# EAGLE board mcuboard (EAGLE 7.1.0)
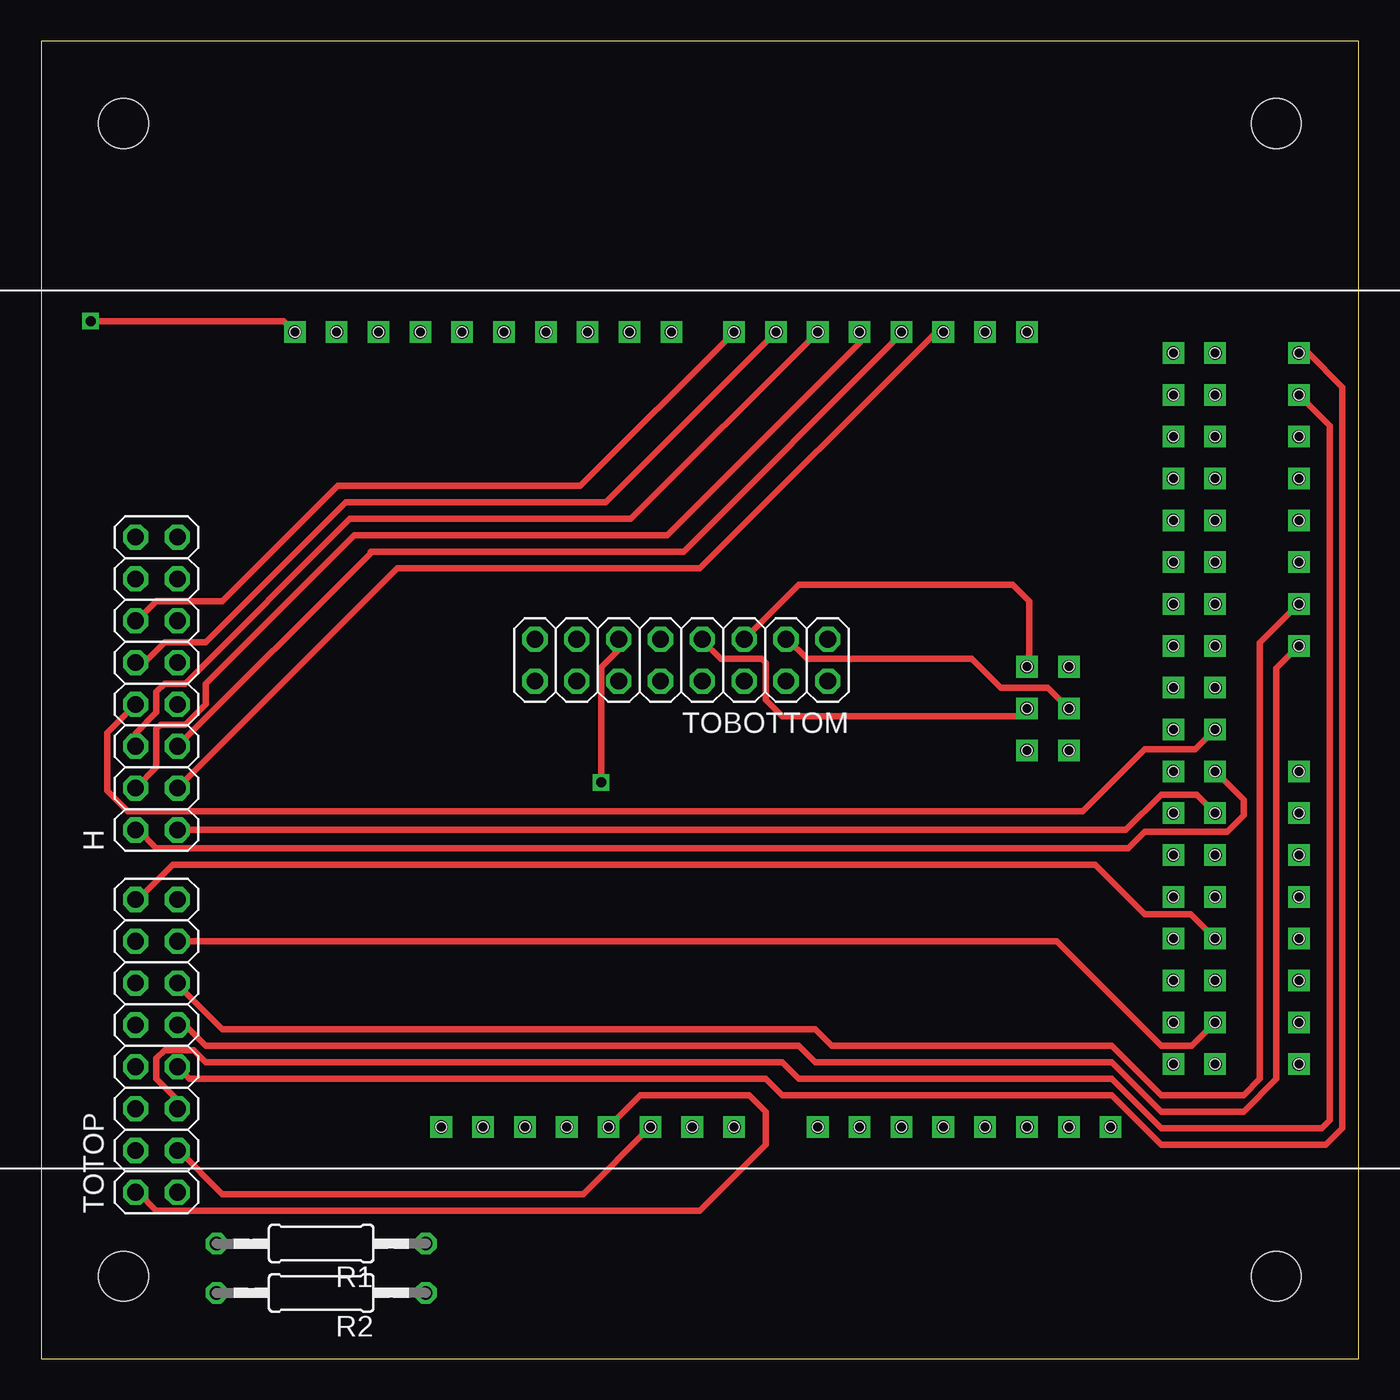
[diagram p0: board, top side]
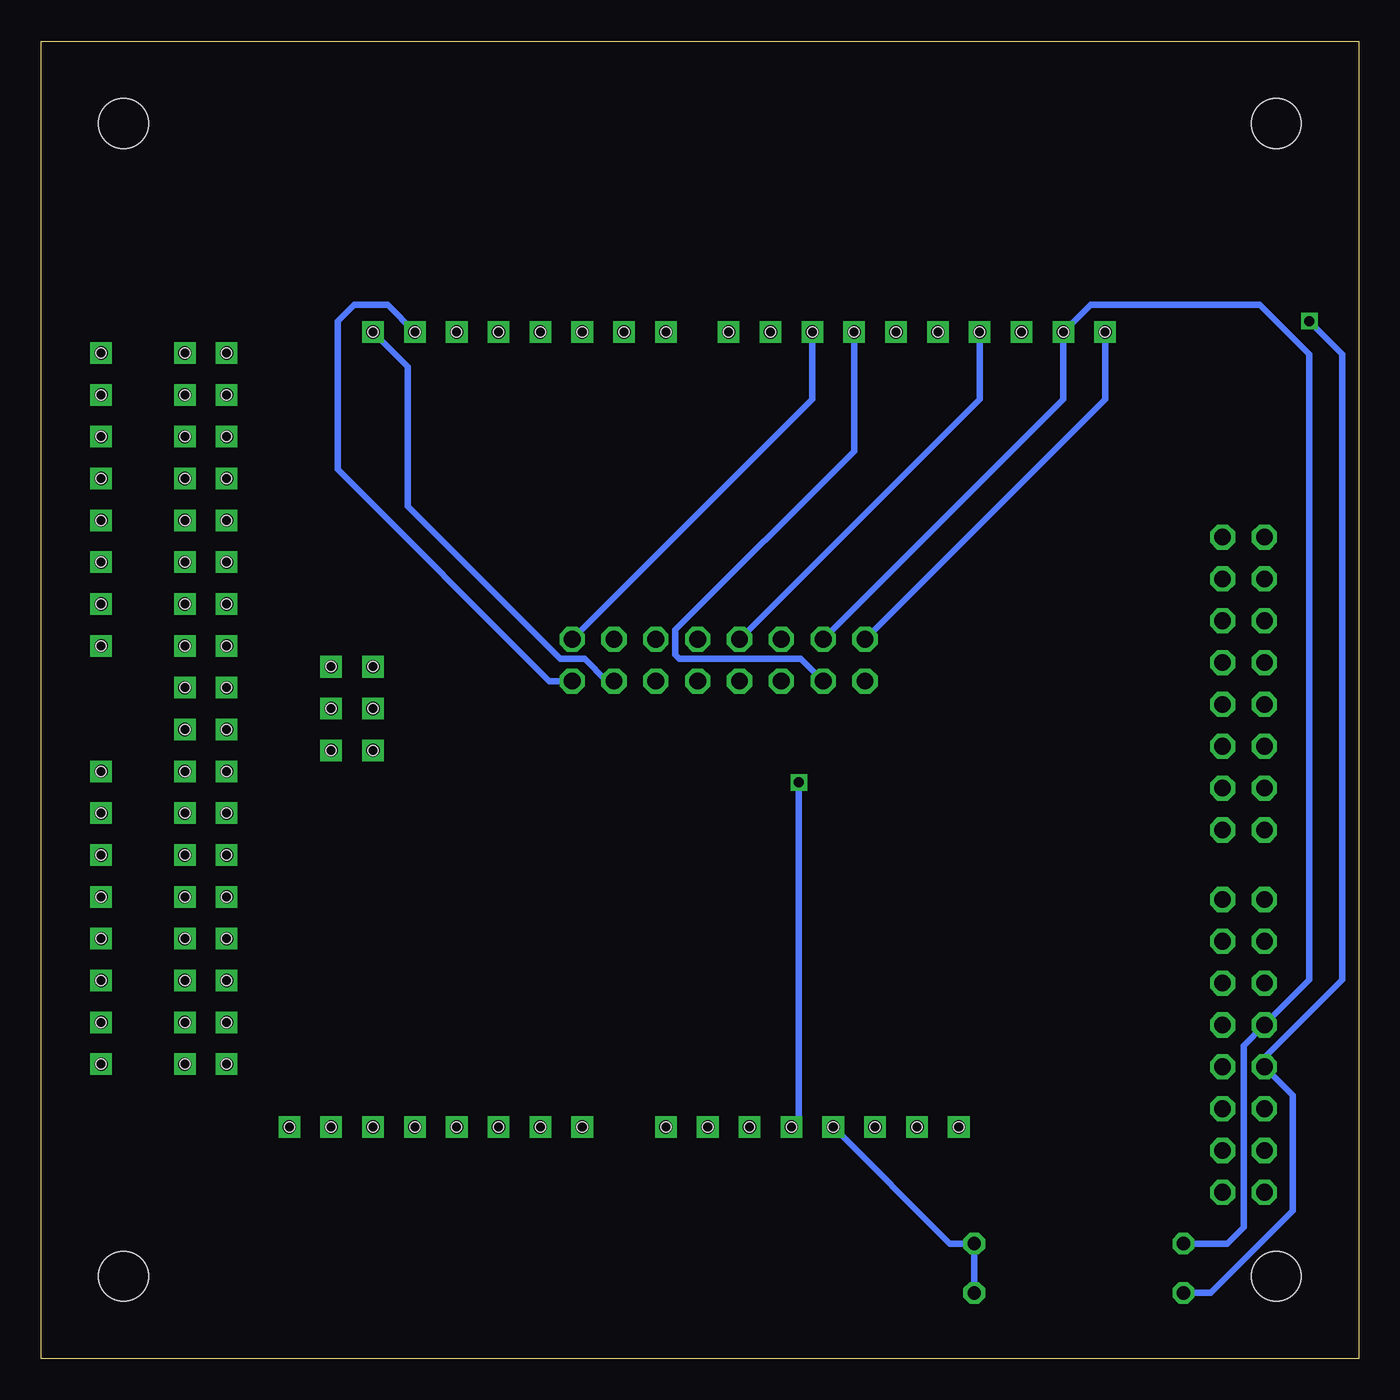
[diagram p1: board, bottom side, seen from below]

Size 80 x 80 mm. Coordinates in mm from the lower left corner, seen from the top.
Outline: 0,0 80,0 80,80 0,80 0,0
Copper layers (1*16): Top 0.035mm / dielectric 1.5mm / Bottom 0.035mm
Design rules "default": minimum track width 10mil, minimum drill 24mil, track to track 8mil, track to pad 8mil, pad to pad 8mil, via to via 8mil, smd to smd 8mil, copper to edge 40mil, drill to drill 8mil, minimum pad ring 10mil, minimum via ring 8mil, stop-mask expansion 4mil, vias tented up to drill 0mil, thermal gap 10mil
Holes 3 mm at 5,75 75,75 75,5 5,5

## Footprints (pad centres in the part's own frame; a part is rotated, then mirrored left to right if it is on the bottom)
2X08 = drill 1.016 octagon: 1 -8.89,-1.27; 2 -8.89,1.27; 3 -6.35,-1.27; 4 -6.35,1.27; 5 -3.81,-1.27; 6 -3.81,1.27; 7 -1.27,-1.27; 8 -1.27,1.27; 9 1.27,-1.27; 10 1.27,1.27; 11 3.81,-1.27; 12 3.81,1.27; 13 6.35,-1.27; 14 6.35,1.27; 15 8.89,-1.27; 16 8.89,1.27
0207/12 = drill 0.813 octagon: 1 -6.35,0; 2 6.35,0
IDUINO_PAC = drill 0.8 square: 2 12.7,6.35; 3 10.16,6.35; 3.3V -10.16,-41.91; 4 7.62,6.35; 5 5.08,6.35; 5V -7.62,-41.91; 5V_D 26.67,5.08; 5V_E 29.21,5.08; 5V_S 20.32,-13.97; 6 2.54,6.35; 7 0,6.35; 8 -3.81,6.35; 9 -6.35,6.35; 10 -8.89,6.35; 11 -11.43,6.35; 12 -13.97,6.35; 13 -16.51,6.35; 22 26.67,2.54; 23 29.21,2.54; 24 26.67,0; 25 29.21,0; 26 26.67,-2.54; 27 29.21,-2.54; 28 26.67,-5.08; 29 29.21,-5.08; 30 26.67,-7.62; 31 29.21,-7.62; 32 26.67,-10.16; 33 29.21,-10.16; 34 26.67,-12.7; 35 29.21,-12.7; 36 26.67,-15.24; 37 29.21,-15.24; 38 26.67,-17.78; 39 29.21,-17.78; 40 26.67,-20.32; 41 29.21,-20.32; 42 26.67,-22.86; 43 29.21,-22.86; 44 26.67,-25.4; 45 29.21,-25.4; 46 26.67,-27.94; 47 29.21,-27.94; 48 26.67,-30.48; 49 29.21,-30.48; 50 26.67,-33.02; 51 29.21,-33.02; 52 26.67,-35.56; 53 29.21,-35.56; A0 5.08,-41.91; A1 7.62,-41.91; A2 10.16,-41.91; A3 12.7,-41.91; A4 15.24,-41.91; A5 17.78,-41.91; A6 20.32,-41.91; A7 22.86,-41.91; A8 34.29,-38.1; A9 34.29,-35.56; A10 34.29,-33.02; A11 34.29,-30.48; AREF -21.59,6.35; CANRX 34.29,-22.86; CANTX 34.29,-20.32; DAC0 34.29,-27.94; DAC1 34.29,-25.4; GND_A1 -5.08,-41.91; GND_A2 -2.54,-41.91; GND_D 26.67,-38.1; GND_E 29.21,-38.1; GND_H -19.05,6.35; GND_S 20.32,-19.05; IOREF -15.24,-41.91; MASTER-RESET 17.78,-19.05; MISO 17.78,-13.97; MOSI 20.32,-16.51; NONE_A -17.78,-41.91; RESET -12.7,-41.91; RX0 17.78,6.35; RX1 34.29,-7.62; RX2 34.29,-2.54; RX3 34.29,2.54; SCL 34.29,-12.7; SCL1 -26.67,6.35; SDA 34.29,-10.16; SDA1 -24.13,6.35; SPCK 17.78,-16.51; TX0 15.24,6.35; TX1 34.29,-5.08; TX2 34.29,0; TX3 34.29,5.08; VIN 0,-41.91 | hole 0.6: 2.54,6.35; 5.08,6.35; 7.62,6.35; 10.16,6.35; 12.7,6.35; 26.67,5.08; 26.67,2.54; 26.67,0; 26.67,-2.54; 26.67,-5.08; 26.67,-7.62; 26.67,-10.16; 26.67,-12.7; 26.67,-15.24; 26.67,-17.78; 26.67,-20.32; 26.67,-22.86; 26.67,-25.4; 26.67,-27.94; 26.67,-30.48; 26.67,-33.02; 26.67,-35.56; 26.67,-38.1; 29.21,5.08; 29.21,2.54; 29.21,0; 29.21,-2.54; 29.21,-5.08; 29.21,-7.62; 29.21,-10.16; 29.21,-12.7; 29.21,-15.24; 29.21,-17.78; 29.21,-20.32; 29.21,-22.86; 29.21,-25.4; 29.21,-27.94; 29.21,-30.48; 29.21,-33.02; 29.21,-35.56; 29.21,-38.1; 34.29,5.08; 34.29,2.54; 34.29,0; 34.29,-2.54; 34.29,-5.08; 34.29,-7.62; 34.29,-10.16; 34.29,-12.7; 34.29,-38.1; 34.29,-35.56; 34.29,-33.02; 34.29,-30.48; 34.29,-27.94; 34.29,-25.4; 34.29,-22.86; 34.29,-20.32; 22.86,-41.91; 20.32,-41.91; 17.78,-41.91; 15.24,-41.91; 12.7,-41.91; 10.16,-41.91; 7.62,-41.91; 5.08,-41.91; 0,-41.91; -2.54,-41.91; -5.08,-41.91; -7.62,-41.91; -10.16,-41.91; -12.7,-41.91; -15.24,-41.91; -17.78,-41.91; 17.78,6.35; 15.24,6.35; 0,6.35; -3.81,6.35; -6.35,6.35; -8.89,6.35; -11.43,6.35; -13.97,6.35; -16.51,6.35; -19.05,6.35; -21.59,6.35; -24.13,6.35; -26.67,6.35; 20.32,-19.05; 20.32,-16.51; 20.32,-13.97; 17.78,-13.97; 17.78,-16.51; 17.78,-19.05

## Placement (x,y rotation side)
H  [2X08]  7,41 90 top
R1  [0207/12]  17,7 180 top
R2  [0207/12]  17,4 180 top
TOBOTTOM  [2X08]  38.87,42.42 180 top
TOTOP  [2X08]  7,19 90 top
U$1  IDUINO1  [IDUINO_PAC]  42.07,55.99 0 top

## Library data of the parts
H TOBOTTOM TOTOP = pinhead
R1 R2 = resistor; SPICEPREFIX: R
U$1 = iduino

## Nets
N$1: TOBOTTOM.7 U$1.SPCK
N$2: TOBOTTOM.3 U$1.MOSI
N$3: TOBOTTOM.5 U$1.MISO
N$4: TOBOTTOM.9 U$1.GND_H
N$5: TOBOTTOM.11 TOTOP.2 U$1.5V
N$6: R1.2 TOBOTTOM.13 TOTOP.10 U$1.SDA1
N$7: R2.2 TOBOTTOM.15 TOTOP.8 U$1.SCL1
N$8: TOBOTTOM.2 U$1.TX0
N$9: TOTOP.3 U$1.GND_A1
N$10: TOBOTTOM.4 U$1.RX0
N$11: TOBOTTOM.14 U$1.11
N$12: TOBOTTOM.1 U$1.10
N$13: TOTOP.5 U$1.RX3
N$14: TOTOP.7 U$1.TX3
N$15: TOTOP.9 U$1.SCL
N$16: TOTOP.11 U$1.SDA
N$17: R1.1 R2.1 U$1.3.3V
N$18: TOTOP.13 U$1.53
N$19: TOTOP.15
N$20: TOTOP.16 U$1.49
N$21: TOTOP.14
N$22: TOTOP.12
N$23: H.1 U$1.43
N$24: H.8 U$1.39
N$25: H.3 U$1.2
N$26: H.5 U$1.3
N$27: H.4 U$1.4
N$29: H.2 U$1.41
N$30: H.10 U$1.6
N$31: H.12 U$1.7
N$33: H.6 U$1.5

## Tracks (layer width: path | path; a pad name or v marks a point on that pad's centre or on a via)
N$1
  Top 0.406: TOBOTTOM.7 40.14,43.61 41.25,42.5 43.75,42.5 44,42.25 44,40 45,39 59.37,39 U$1.SPCK
N$2
  Top 0.406: TOBOTTOM.3 45.31,43.69 46.5,42.5 56.5,42.5 58.25,40.75 61.12,40.75 U$1.MOSI
N$3
  Top 0.406: TOBOTTOM.5 46,47 59,47 60,46 60,42.17 U$1.MISO
N$4
  Bottom 0.406: U$1.GND_H 23.02,58.27 TOBOTTOM.9
N$5  (via drill 0.6)
  Top 0.406: TOTOP.2 5.89,10.11 7,9 40,9 44,13 44,15 43,16 36.37,16 U$1.5V | TOBOTTOM.11 35.06,43.06 34,42 v34,35
  Bottom 0.406: v34,35 34,14.53 U$1.5V
N$6
  Bottom 0.406: TOBOTTOM.13 17.94,58.27 U$1.SDA1 16.28,64 6,64 3,61 3,23 TOTOP.10 7,19 7,8 8,7 R1.2
N$7  (via drill 0.6)
  Top 0.406: v3,63 14.74,63 U$1.SCL1
  Bottom 0.406: U$1.SCL1 15.4,58.27 TOBOTTOM.15 | R2.2 9,4 4,9 4,16 TOTOP.8 5.73,18.27 1,23 1,61 v3,63
N$8
  Bottom 0.406: TOBOTTOM.2 49.15,41.15 62,54 62,63 61,64 58.97,64 U$1.TX0
N$9
  Top 0.406: TOTOP.3 8.35,12.65 11,10 32.91,10 U$1.GND_A1
N$10
  Bottom 0.406: TOBOTTOM.4 45.65,41.15 47,42.5 48.5,42.5 57.75,51.75 57.75,60.24 U$1.RX0
N$11
  Bottom 0.406: U$1.11 30.64,55.11 41.5,44.25 41.5,42.75 41.25,42.5 33.87,42.5 TOBOTTOM.14
N$12
  Bottom 0.406: U$1.10 33.18,58.27 TOBOTTOM.1
N$13
  Top 0.406: TOTOP.5 8.27,15.73 7,17 7,18.25 7.5,18.75 9.25,18.75 10,18 45,18 46,17 65,17 68,14 77.75,14 78.25,14.5 78.25,56.64 U$1.RX3
N$14
  Top 0.406: U$1.TX3 76.93,61.07 79,59 79,14 78,13 68,13 65,16 45,16 44,17 9,17 TOTOP.7
N$15
  Top 0.406: TOTOP.9 8.73,20.27 10,19 46,19 47,18 65,18 68,15 73,15 75,17 75,41.93 U$1.SCL
N$16
  Top 0.406: TOTOP.11 8.27,22.73 11,20 47,20 48,19 65,19 68,16 73,16 74,17 74,43.47 U$1.SDA
N$17
  Bottom 0.406: R2.1 R1.1 24.83,7 U$1.3.3V
N$18
  Top 0.406: TOTOP.13 61.65,25.35 68,19 69.85,19 U$1.53
N$20
  Top 0.406: TOTOP.16 5.89,27.89 8,30 64,30 67,27 69.79,27 U$1.49
N$23
  Top 0.406: H.1 65.86,32.11 68,34.25 70.16,34.25 U$1.43
N$24
  Top 0.406: H.8 4,38 4,34.5 5.25,33.25 63.25,33.25 67,37 70.07,37 U$1.39
N$25
  Top 0.406: U$1.2 54.34,62.34 40,48 21.62,48 H.3
N$26
  Top 0.406: U$1.3 52.23,62.23 39,49 20,49 20,48.92 H.5
N$27
  Top 0.406: U$1.4 49.69,61.69 38,50 19,50 10,41 10,39.75 8.75,38.5 7.25,38.5 7,38.25 7,35.92 H.4
N$29
  Top 0.406: H.2 5.89,32.11 7,31 66,31 67,32 72,32 73,33 73,33.95 U$1.41
N$30
  Top 0.406: H.10 6.27,42.27 7.5,43.5 10,43.5 18.5,52 34.27,52 U$1.6
N$31
  Top 0.406: H.12 5.81,44.81 7,46 11,46 18,53 32.73,53 U$1.7
N$33
  Top 0.406: H.6 5.73,37.98 7,39.25 7,40.5 7.5,41 8.75,41 18.75,51 35.81,51 U$1.5